# EAGLE board xmega-a3u-header (EAGLE 7.6.0)
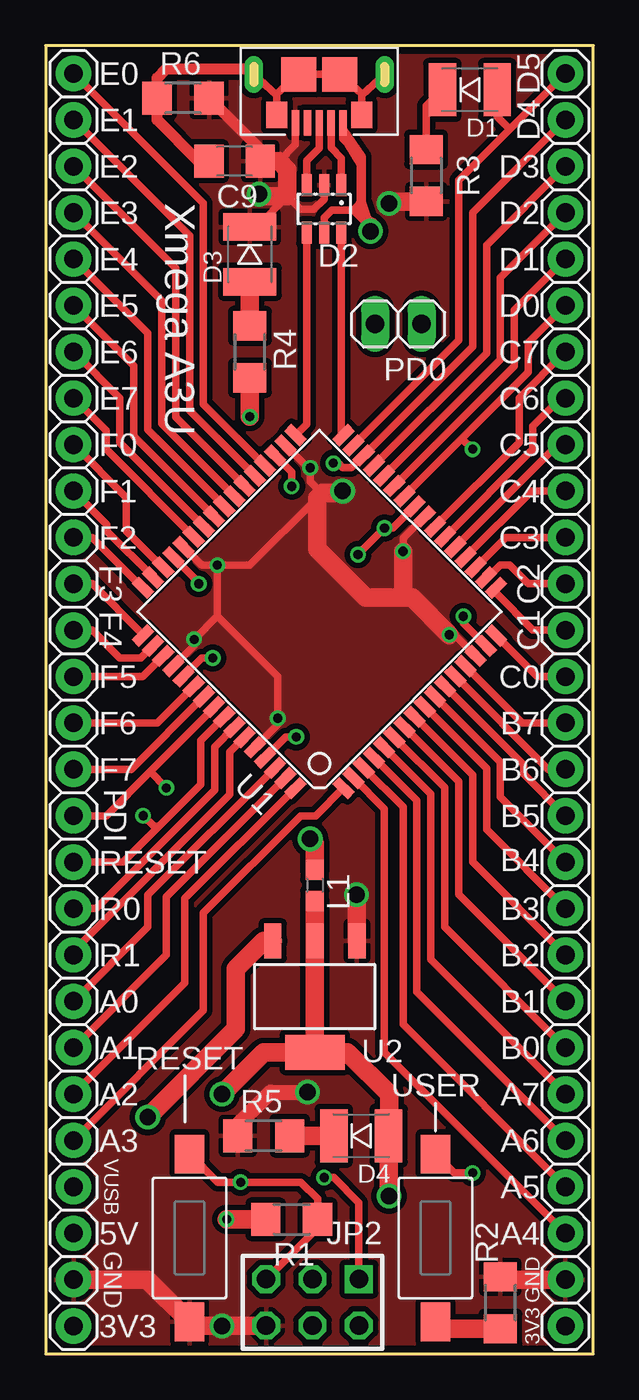
[diagram p0: board, top side]
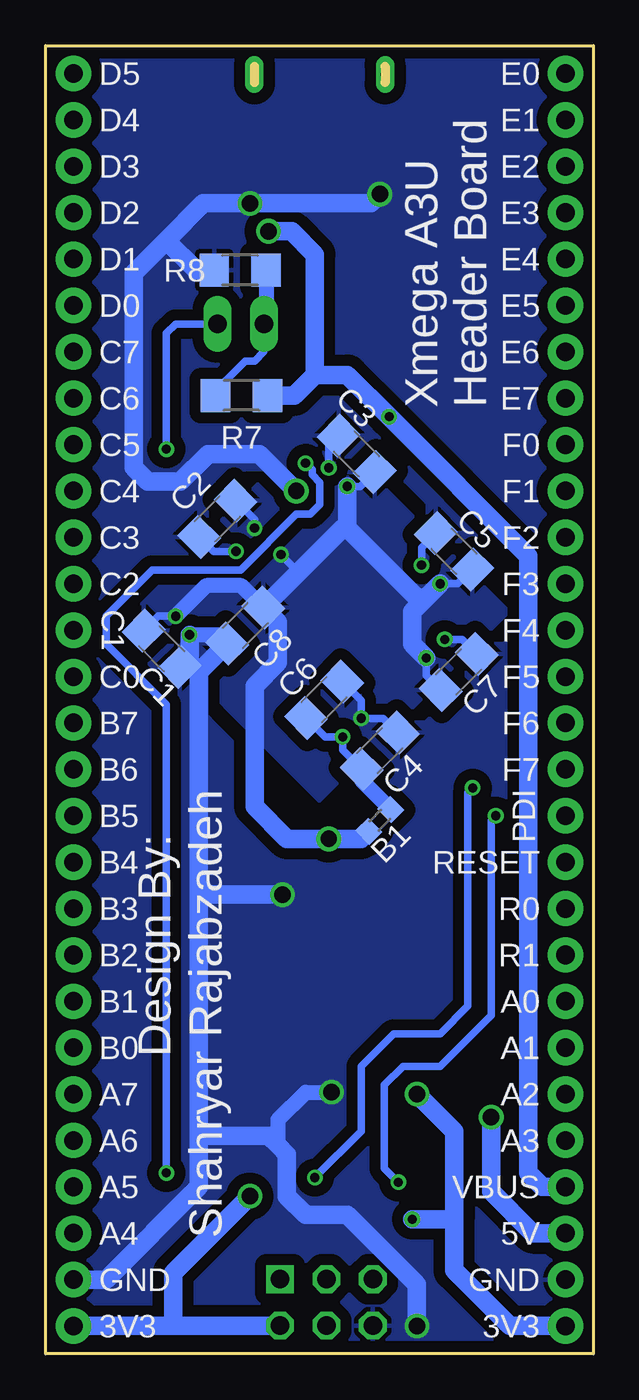
[diagram p1: board, bottom side, seen from below]

Size 29.97 x 71.63 mm. Coordinates in mm from the lower left corner, seen from the top.
Outline: 0,0 29.97,0 29.97,71.63 0,71.63 0,0
Copper layers (1*16): Top 0.0356mm / dielectric 1.5011mm / Bottom 0.0356mm
Design rules "oshpark-2layer": minimum track width 6mil, minimum drill 13mil, track to track 6mil, track to pad 6mil, pad to pad 6mil, via to via 6mil, smd to smd 6mil, copper to edge 15mil, drill to drill 6mil, minimum pad ring 7mil, minimum via ring 7mil, stop-mask expansion 2.5mil, vias tented up to drill 0mil, thermal gap 10mil

## Footprints (pad centres in the part's own frame; a part is rotated, then mirrored left to right if it is on the bottom)
B0603 = smd 1 x 1.1: 1 -0.85,0; 2 0.85,0
C1206 = smd 1.6 x 1.8: 1 -1.4,0; 2 1.4,0
1210K = smd 1.5 x 2.9: NEG 1.5,0; POS -1.5,0
SOT23-6 = smd 0.55 x 1.2: 1 -0.95,-1.3; 2 0,-1.3; 3 0.95,-1.3; 4 0.95,1.3; 5 0,1.3; 6 -0.95,1.3
1X28C = drill 1.016 pad 1.93: 1 -34.29,0; 2 -31.75,0; 3 -29.21,0; 4 -26.67,0; 5 -24.13,0; 6 -21.59,0; 7 -19.05,0; 8 -16.51,0; 9 -13.97,0; 10 -11.43,0; 11 -8.89,0; 12 -6.35,0; 13 -3.81,0; 14 -1.27,0; 15 1.27,0; 16 3.81,0; 17 6.35,0; 18 8.89,0; 19 11.43,0; 20 13.97,0; 21 16.51,0; 22 19.05,0; 23 21.59,0; 24 24.13,0; 25 26.67,0; 26 29.21,0; 27 31.75,0; 28 34.29,0
AVR-ISP-6 = drill 1.016 square: 1 -2.54,-1.27 | drill 1.016 octagon: 2 -2.54,1.27; 3 0,-1.27; 4 0,1.27; 5 2.54,-1.27; 6 2.54,1.27
USB3076-30-A = smd 1.9 x 1.9: BIG_PAD_LEFT 5.125,1.45; BIG_PAD_RIGHT 2.875,1.45 | smd 0.4 x 1.4: D+ 4,4.1; D- 3.35,4.1; GND 5.3,4.1; ID 4.65,4.1; VBUS 2.7,4.1 | drill 0.45 pad 1.016 long: MECH_RIGHT 0.42,1.45; SHIELD_LEFT 7.58,1.45 | smd 1.15 x 1.45: PAD_LEFT 6.32,3.68; PAD_RIGHT 1.68,3.68
L0603 = smd 1.1 x 1: 1 -0.85,0; 2 0.85,0
1X02 = drill 1.016 long: 1 -1.27,0; 2 1.27,0
R1206 = smd 1.6 x 1.803: 1 -1.422,0; 2 1.422,0
FSMSM = smd 2.11 x 1.6: 1 -4.595,0; 2 4.595,0
TQFP64 = smd 1.194 x 0.559: 1 -7.76,5.905; 2 -7.76,5.118; 3 -7.76,4.331; 4 -7.76,3.543; 5 -7.76,2.756; 6 -7.76,1.968; 7 -7.76,1.181; 8 -7.76,0.394; 9 -7.76,-0.394; 10 -7.76,-1.181; 11 -7.76,-1.968; 12 -7.76,-2.756; 13 -7.76,-3.543; 14 -7.76,-4.331; 15 -7.76,-5.118; 16 -7.76,-5.905; 33 7.76,-5.905; 34 7.76,-5.118; 35 7.76,-4.331; 36 7.76,-3.543; 37 7.76,-2.756; 38 7.76,-1.968; 39 7.76,-1.181; 40 7.76,-0.394; 41 7.76,0.394; 42 7.76,1.181; 43 7.76,1.968; 44 7.76,2.756; 45 7.76,3.543; 46 7.76,4.331; 47 7.76,5.118; 48 7.76,5.905 | smd 0.559 x 1.194: 17 -5.905,-7.76; 18 -5.118,-7.76; 19 -4.331,-7.76; 20 -3.543,-7.76; 21 -2.756,-7.76; 22 -1.968,-7.76; 23 -1.181,-7.76; 24 -0.394,-7.76; 25 0.394,-7.76; 26 1.181,-7.76; 27 1.968,-7.76; 28 2.756,-7.76; 29 3.543,-7.76; 30 4.331,-7.76; 31 5.118,-7.76; 32 5.905,-7.76; 49 5.905,7.76; 50 5.118,7.76; 51 4.331,7.76; 52 3.543,7.76; 53 2.756,7.76; 54 1.968,7.76; 55 1.181,7.76; 56 0.394,7.76; 57 -0.394,7.76; 58 -1.181,7.76; 59 -1.968,7.76; 60 -2.756,7.76; 61 -3.543,7.76; 62 -4.331,7.76; 63 -5.118,7.76; 64 -5.905,7.76
SOT223TAB = smd 0.95 x 1.9: 1 -2.3,-3.05; 2 0,-3.05; 3 2.3,-3.05 | smd 3.25 x 1.9: 4 0,3.05

## Placement (x,y rotation side)
B1  FERRITE_BEADB0603  [B0603]  11.68,29.21 225 bottom
C1  100nF  [C1206]  23.62,38.61 315 bottom
C2  100nF  [C1206]  20.57,45.72 225 bottom
C3  100nF  [C1206]  12.95,49.28 135 bottom
C4  100n  [C1206]  11.68,33.02 45 bottom
C5  100nF  [C1206]  7.62,43.94 135 bottom
C6  10u  [C1206]  14.73,35.81 45 bottom
C7  100nF  [C1206]  7.37,37.34 45 bottom
C8  10u  [C1206]  19.05,39.88 225 bottom
C9  4.7n  [C1206]  10.34,65.3 180 top
D1  LED  [1210K]  23.22,69.22 180 top
D2  ESD_USB  [SOT23-6]  15.24,62.69 180 top
D3  LED  [1210K]  11.18,60.2 90 top
D4  LED  [1210K]  17.27,11.94 180 top
JP1  PINHD-1X28SC  [1X28C]  28.45,35.81 90 top
JP2  AVR-PDIVERT  [AVR-ISP-6]  14.61,2.82 180 top
JP3  PINHD-1X28SC  [1X28C]  1.52,35.81 90 top
JP4  USB_MICRO_B  [USB3076-30-A]  18.97,71.5 180 top
L1  10u  [L0603]  14.73,25.65 270 top
PD0  [1X02]  19.3,56.39 180 top
R1  10k  [R1206]  13.46,7.37 180 top
R2  1k  [R1206]  24.89,2.79 270 top
R3  1k  [R1206]  20.83,64.52 90 top
R4  10k  [R1206]  11.18,54.86 270 top
R5  1k  [R1206]  11.94,11.94 0 top
R6  1M  [R1206]  7.52,68.76 0 top
R7  1k  [R1206]  19.25,52.48 0 bottom
R8  1.5k  [R1206]  19.33,59.33 0 bottom
RESET  TACTILE-BUTTONSMD-2PIN  [FSMSM]  7.87,6.35 90 top
U1  XMEGA-A3(U)TQFP  [TQFP64]  14.99,40.64 135 top
U2  [SOT223TAB]  14.73,19.56 180 top
USER  TACTILE-BUTTONSMD-2PIN  [FSMSM]  21.34,6.35 270 top

## Library data of the parts
B1 D1-D4 JP4 RESET U2 USER = USB-req
C1-C9 L1 = rcl
JP1 JP3 PD0 = pinhead
JP2 U1 = avr-7
R1-R8 = resistor

## Nets
1: C9.2 JP4.BIG_PAD_LEFT JP4.BIG_PAD_RIGHT JP4.MECH_RIGHT JP4.PAD_LEFT JP4.PAD_RIGHT JP4.SHIELD_LEFT R6.1
+3V3: D4.POS JP1.1 JP2.2 JP3.1 L1.2 R1.2 U2.2 U2.4
+5V: JP3.3 U2.3
D+: D2.3 JP4.D+
D-: D2.1 JP4.D-
DIGITAL_VCC: B1.2 C1.1 C2.1 C3.1 C5.1 C7.1 C8.1 L1.1 U1.15 U1.25 U1.35 U1.45 U1.53
GND: C1.2 C2.2 C3.2 C4.2 C5.2 C6.2 C7.2 C8.2 C9.1 D2.2 D3.NEG JP1.2 JP2.6 JP3.2 JP4.GND R2.1 R3.1 R5.1 R6.2 R8.1 RESET.1 U1.14 U1.24 U1.34 U1.44 U1.52 U1.60 U2.1
N$1: D3.POS R4.1
N$2: B1.1 C4.1 C6.1 U1.61
N$3: R2.2 USER.2
N$4: D4.NEG R5.2
N$5: D1.NEG R3.2
N$6: PD0.2 R7.1 R8.2
PA0: JP3.8 U1.62
PA1: JP3.7 U1.63
PA2: JP3.6 U1.64
PA3: JP3.5 U1.1
PA4: JP1.3 U1.2
PA5: JP1.4 U1.3
PA6: JP1.5 U1.4
PA7: JP1.6 U1.5
PB0: JP1.7 U1.6
PB1: JP1.8 U1.7
PB2: JP1.9 U1.8
PB3: JP1.10 U1.9
PB4: JP1.11 U1.10
PB5: JP1.12 U1.11
PB6: JP1.13 U1.12
PB7: JP1.14 U1.13
PC0: JP1.15 U1.16
PC1: JP1.16 U1.17
PC2: JP1.17 U1.18
PC3: JP1.18 U1.19
PC4: JP1.19 U1.20
PC5: JP1.20 U1.21
PC6: JP1.21 U1.22
PC7: JP1.22 U1.23
PD0: JP1.23 PD0.1 U1.26
PD1: JP1.24 U1.27
PD2: JP1.25 U1.28
PD3: JP1.26 U1.29
PD4: JP1.27 U1.30 USER.1
PD5: D1.POS JP1.28 U1.31
PD6: D2.6 U1.32
PD7: D2.4 U1.33
PDI-CLK: JP2.5 JP3.11 R1.1 RESET.2 U1.57
PDI-DATA: JP2.1 JP3.12 U1.56
PE0: JP3.28 U1.36
PE1: JP3.27 U1.37
PE2: JP3.26 U1.38
PE3: JP3.25 U1.39
PE4: JP3.24 U1.40
PE5: JP3.23 U1.41
PE6: JP3.22 U1.42
PE7: JP3.21 U1.43
PF0: JP3.20 U1.46
PF1: JP3.19 U1.47
PF2: JP3.18 U1.48
PF3: JP3.17 U1.49
PF4: JP3.16 U1.50
PF5: JP3.15 U1.51
PF6: JP3.14 U1.54
PF7: JP3.13 U1.55
PR0: JP3.10 U1.58
PR1: JP3.9 U1.59
VBUS: D2.5 JP3.4 JP4.VBUS R4.2 R7.2

## Tracks (layer width: path | path; a pad name or v marks a point on that pad's centre or on a via)
1
  Top 0.406: JP4.MECH_RIGHT 17.29,68.92 JP4.PAD_RIGHT 17.29,68.98 JP4.BIG_PAD_RIGHT JP4.BIG_PAD_LEFT 12.65,68.98 12.65,68.92 | JP4.PAD_LEFT 12.65,68.92 | 12.65,68.92 JP4.SHIELD_LEFT
  Top 0.61: C9.2 8.36,65.3 6.1,67.56 R6.1 6.1,69.85 6.6,70.36 11.09,70.36 JP4.SHIELD_LEFT
+3V3  (via drill 0.5, 0.9)
  Top 1.016: L1.2 U2.2 U2.4 | U2.4 11.94,16.51 v9.65,14.22 | U2.4 16.51,16.51 18.8,14.22 18.8,11.96 D4.POS 18.77,8.66 v18.8,8.64 | R1.2 v9.91,7.37
  Bottom 1.016: v9.65,14.22 7.62,12.19 7.62,7.37 | JP3.1 4.57,1.52 7.62,4.57 7.62,7.37 | JP1.1 28.42,1.55 22.98,1.55 | 22.98,1.55 22.98,4.45 v18.8,8.64 | JP2.2 22.98,1.55 | 7.62,7.37 v9.91,7.37
+5V  (via drill 0.9)
  Top 1.016: U2.3 11.94,22.61 10.41,21.08 10.41,17.78 v5.59,12.95
  Bottom 1.016: v5.59,12.95 5.59,8.89 3.3,6.6 JP3.3
D+
  Top 0.406: D2.3 14.29,65.32 14.99,66.02 14.99,67.39 JP4.D+
D-
  Top 0.406: D2.1 16.19,65.47 15.62,66.04 JP4.D-
DIGITAL_VCC  (via drill 0.5, 0.9)
  Top 0.406: U1.25 19,45.21 v18.54,45.21 v17.09,43.76 | U1.35 13.46,48.29 v13.46,47.5 | U1.45 8.38,42.23 v8.38,42.16 | U1.53 8.55,38.1 v9.14,38.1 | U1.15 22.86,40 v22.86,40.39
  Top 1.016: L1.1 14.73,27.94 v14.48,28.19
  Bottom 0.406: C2.1 18.54,45.67 v18.54,45.21 | C3.1 12.75,47.5 v13.46,47.5 | C5.1 7.42,42.16 v8.38,42.16 | C7.1 9.14,37.14 v9.14,38.1 | C1.1 23.82,40.39 v22.86,40.39 | B1.2 12.7,28.19 | v17.09,43.76 16.38,43.05 15.88,43.05
  Bottom 0.813: C8.1 19.25,42.06 21.18,42.06 v22.86,40.39
  Bottom 1.016: 12.7,28.19 v14.48,28.19 16.76,28.19 18.54,29.97 18.54,36.58 17.27,37.85 17.27,40.08 C8.1 15.88,43.05 13.72,45.21 13.46,45.21 | v8.38,42.16 9.14,41.4 | v13.46,47.5 13.46,45.21 | 13.46,45.21 9.65,41.4 9.14,41.4 | 9.14,41.4 9.91,40.64 9.91,38.86 v9.14,38.1
  pour Bottom (isolate 0.61): 14.99,51.05 4.57,40.64 14.99,30.23 25.4,40.64
GND  (via drill 0.5, 0.9)
  Top 0.406: D2.2 15.24,63.22 14.68,62.66 13.95,62.66 13.23,63.37 11.56,61.7 D3.NEG | U1.24 19.56,44.66 v19.56,43.94 | U1.34 14.35,48.51 v14.48,48.51 14.48,47.75 15.11,47.12 14.86,46.86 11.18,43.18 v9.4,43.18 | U1.44 8.55,43.18 v9.4,43.18 | U1.60 12.7,34.46 v12.7,34.8 12.7,37.08 9.4,40.39 | U1.52 8.13,38.79 v8.13,39.12 9.4,40.39 | U1.14 22.38,39.37 v22.1,39.37 | 9.4,40.39 v9.4,43.18 | JP4.GND 13.67,66.2 12.78,65.3
  Top 0.61: C9.1 11.74,65.96 R6.2
  Top 0.813: R5.1 10.52,12.55 12.29,14.33 v14.33,14.33
  Top 1.016: R3.1 18.9,63.09 v18.8,62.99 | 15.11,47.12 16.13,47.12 v16.26,47.24 | v11.68,63.5 11.81,63.37 13.23,63.37 13.23,64.85 12.78,65.3 C9.1 | v22.1,39.37 20.07,41.4 19.56,41.4 | 19.56,41.4 17.53,41.4 14.86,44.07 14.86,46.86 | v19.56,43.94 19.56,41.4 | U2.1 17.02,22.62 v17.02,25.15 | JP3.2 5.57,4.06 RESET.1 | RESET.1 8.08,1.55 JP2.6 | v9.65,1.52 8.11,1.52 RESET.1 | R2.1 25.04,4.06 JP1.2
  Bottom 0.406: C2.2 20.78,43.94 v19.56,43.94 | C3.2 14.48,49.73 v14.48,48.51 | C5.2 9.4,44.14 v9.4,43.18 | C6.2 12.7,35.76 v12.7,34.8 11.48,34.8 C4.2 | C7.2 7.16,39.12 v8.13,39.12 | C1.2 22.1,38.15 | v22.1,39.37 21.97,39.24
  Bottom 0.813: C8.2 20.52,39.37 v22.1,39.37 | 17.25,11.4 17.25,12.83 15.75,14.33 v14.33,14.33
  Bottom 1.016: 22.1,38.15 v22.1,39.37 | 23.37,60.96 21.34,62.99 v18.8,62.99 12.19,62.99 v11.68,63.5 | 23.37,60.96 25.15,59.18 25.15,48.51 24.38,47.75 22.61,47.75 21.08,49.28 18.29,49.28 v16.26,47.24 | R8.1 21.74,59.33 23.37,60.96 | C8.2 21.59,37.34 21.59,25.15 | JP1.2 26.67,4.06 21.59,9.14 21.59,11.94 | v17.02,25.15 21.59,25.15 | v9.65,1.52 9.65,3.81 13.46,7.62 15.75,7.62 16.76,8.64 16.76,10.92 17.25,11.4 17.78,11.94 21.59,11.94 | 21.59,25.15 21.59,11.94
  pour Top (isolate 0.305): 0,71.63 29.97,71.63 29.97,0 0,0
  pour Bottom (isolate 0.61, rank 2): 0,71.63 29.97,71.63 29.97,0 0,0
N$1
  Top 1.016: D3.POS R4.1
N$2  (via drill 0.5)
  Top 0.406: U1.61 13.14,33.78 v13.72,33.78
  Bottom 0.406: C4.1 13.72,33.07 v13.72,33.78 14.68,33.78 C6.1
  Bottom 0.813: B1.1 12.67,31.4 C4.1
N$3
  Top 1.016: R2.2 21.72,1.37 USER.2
N$4
  Top 1.016: D4.NEG R5.2
N$5
  Top 0.406: D1.NEG 20.83,68.33 R3.2
N$6
  Bottom 0.406: R7.1 20.68,52.73 19.05,54.36 18.54,54.36 18.03,54.86 PD0.2 17.91,56.52
  Bottom 0.813: R8.2 17.91,56.52
PA0
  Top 0.406: U1.62 5.59,25.12 5.59,23.37 JP3.8
PA1
  Top 0.406: U1.63 6.6,25.02 6.6,21.84 JP3.7
PA2
  Top 0.406: U1.64 7.62,24.92 7.62,20.32 JP3.6
PA3
  Top 0.406: U1.1 14.78,29.46 13.97,29.46 8.64,24.13 8.64,18.8 JP3.5
PA4
  Top 0.406: U1.2 18.54,29.85 18.54,16.51 JP1.3
PA5
  Top 0.406: U1.3 19.56,29.94 19.56,18.03 JP1.4
PA6
  Top 0.406: U1.4 20.32,30.3 20.32,19.81 JP1.5
PA7
  Top 0.406: U1.5 21.08,30.65 21.08,21.59 JP1.6
PB0
  Top 0.406: U1.6 21.84,31 21.84,23.37 JP1.7
PB1
  Top 0.406: U1.7 22.61,31.35 22.61,25.15 JP1.8
PB2
  Top 0.406: U1.8 23.37,31.7 23.37,26.92 JP1.9
PB3
  Top 0.406: U1.9 24.13,32.05 24.13,28.7 JP1.10
PB4
  Top 0.406: U1.10 24.89,32.4 24.89,30.48 JP1.11
PB5
  Top 0.406: U1.11 26.16,32.25 26.16,31.75 JP1.12
PB6
  Top 0.406: U1.12 27.52,32 JP1.13
PB7
  Top 0.406: U1.13 26.09,34.54 JP1.14
PC0
  Top 0.406: U1.16 26.89,37.08 JP1.15
PC1
  Top 0.406: U1.17 24.65,41.65 26.67,39.62 JP1.16
PC2
  Top 0.406: U1.18 24.09,42.46 24.13,42.42 24.89,43.18 25.4,43.18 26.42,42.16 JP1.17
PC3
  Top 0.406: U1.19 25.18,44.7 JP1.18
PC4
  Top 0.406: U1.20 26.6,47.24 JP1.19
PC5
  Top 0.406: U1.21 28.03,49.78 JP1.20
PC6
  Top 0.406: U1.22 26.67,49.54 26.67,50.8 28.19,52.32 JP1.21
PC7
  Top 0.406: U1.23 25.91,49.89 25.91,52.32 JP1.22
PD0  (via drill 0.5)
  Top 0.406: U1.26 22.79,50.11 | 22.79,50.11 26.42,53.74 26.42,55.37 JP1.23 | v23.37,49.53 | v23.37,49.53 22.79,50.11
  Bottom 0.406: PD0.1 22.86,56.39 23.37,55.88 v23.37,49.53
PD1
  Top 0.406: U1.27 25.65,54.09 25.65,57.15 JP1.24
PD2
  Top 0.406: U1.28 24.89,54.44 24.89,58.93 JP1.25
PD3
  Top 0.406: U1.29 24.13,54.8 24.13,60.71 JP1.26
PD4  (via drill 0.5)
  Top 0.406: JP1.27 23.37,62.48 23.37,55.15 U1.30 16.73,48.51 16.26,48.51 16,48.77 v15.75,48.77 | USER.1 22.38,9.91 v23.37,9.91
  Bottom 0.406: v15.75,48.77 15.39,48.41 15.39,48.13 14.96,47.7 14.96,46.51 15.49,45.97 16.26,45.97 19.3,42.93 24.13,42.93 26.67,40.39 26.67,38.86 23.37,35.56 v23.37,9.91
PD5
  Top 0.406: U1.31 22.61,55.5 22.61,64.26 25.4,67.06 | 25.4,67.06 JP1.28 | D1.POS 24.72,67.74 25.4,67.06
PD6
  Top 0.406: U1.32 16.19,50.41 D2.6
PD7
  Top 0.406: U1.33 14.29,50.92 D2.4
PDI-CLK  (via drill 0.5)
  Top 0.406: U1.57 8.48,33.58 8.48,31.17 6.18,28.87 | 6.18,28.87 4.24,26.92 JP3.11 | v5.33,29.46 5.93,28.87 6.18,28.87 | RESET.2 9.42,9.4 v10.67,9.4 13.97,9.4 14.88,8.48 R1.1 14.88,6.91 JP2.5
  Bottom 0.406: v10.67,9.4 11.43,10.16 11.43,14.73 10.41,15.75 8.38,15.75 5.59,18.54 5.59,29.21 v5.33,29.46
PDI-DATA  (via drill 0.5)
  Top 0.406: U1.56 9.22,35.38 5.71,31.88 | 5.71,31.88 3.3,29.46 JP3.12 | v6.6,30.99 5.71,31.88 | v15.24,9.65 15.77,9.65 17.14,8.28 JP2.1
  Bottom 0.406: v15.24,9.65 12.7,12.19 12.7,15.75 10.92,17.53 8.38,17.53 6.86,19.05 6.86,30.73 v6.6,30.99
PE0
  Top 0.406: U1.36 8.64,52 8.64,62.99 JP3.28
PE1
  Top 0.406: U1.37 7.87,51.65 7.87,61.21 JP3.27
PE2
  Top 0.406: U1.38 7.11,51.3 7.11,59.44 JP3.26
PE3
  Top 0.406: U1.39 6.35,50.95 6.35,57.66 JP3.25
PE4
  Top 0.406: U1.40 5.59,50.59 5.59,55.88 JP3.24
PE5
  Top 0.406: U1.41 4.83,50.24 4.83,54.1 JP3.23
PE6
  Top 0.406: U1.42 4.06,49.89 4.06,52.32 JP3.22
PE7
  Top 0.406: U1.43 3.3,49.54 3.3,50.55 JP3.21
PF0
  Top 0.406: U1.46 6.42,43.06 4.42,45.06 4.42,46.89 JP3.20
PF1
  Top 0.406: U1.47 5.88,42.53 3.35,45.06 3.35,45.41 JP3.19
PF2
  Top 0.406: U1.48 5.29,41.95 2.54,44.7 JP3.18
PF3
  Top 0.406: U1.49 5.32,39.38 2.54,42.16 JP3.17
PF4
  Top 0.406: U1.50 5.21,38.1 4.06,38.1 2.54,39.62 JP3.16
PF5
  Top 0.406: U1.51 5.3,37.08 JP3.15
PF6
  Top 0.406: U1.54 6.11,34.54 JP3.14
PF7
  Top 0.406: U1.55 4.68,32 JP3.13
PR0
  Top 0.406: U1.58 9.25,33.22 9.25,30.86 2.77,24.38 JP3.10
PR1
  Top 0.406: U1.59 10.08,32.95 10.08,30.63 1.52,22.07 JP3.9
VBUS  (via drill 0.5, 0.9)
  Top 0.406: D2.5 15.24,62.2 15.65,62.61 16.89,62.61 | JP4.VBUS 16.27,66.53 16.51,66.29 | 16.51,66.29 17.27,65.53 17.3,65.56 17.32,65.56 16.28,67.06 | 16.51,66.29 17.27,65.02
  Top 0.508: 17.78,61.72 16.89,62.61 17.27,62.99 17.27,65.02 17.27,65.53
  Top 0.61: v17.78,61.47 17.27,62.99
  Top 1.016: v17.78,61.47 17.78,61.72 | R4.2 v11.18,51.31
  Bottom 1.016: R7.2 16.36,52.48 15.24,53.59 | 15.24,53.59 15.24,60.2 16.51,61.47 v17.78,61.47 | 15.24,53.59 13.46,53.59 v11.18,51.31 3.56,43.69 3.56,9.91 2.79,9.14 JP3.4

## Text on the board
bPlace: Xmega A3U / Header Board | Design By: | Shahryar Rajabzadeh
tNames: E0 | D5 | E1 | D4 | E2 | D3 | E3 | D2 | E4 | D1 | E5 | Xmega A3U | D0 | E6 | C7 | E7 | C6 | F0 | C5 | F1 | C4 | F2 | C3 | F3 | C2 | F4 | C1 | F5 | C0 | F6 | B7 | F7 | B6 | PDI | B5 | RESET | B4 | R0 | B3 | R1 | B2 | A0 | B1 | A1 | B0 | A2 | A7 | A3 | A6 | VUSB | A5 | 5V | A4 | GND | GND | 3V3 | 3V3
bNames: E0 | D5 | E1 | D4 | E2 | D3 | E3 | D2 | E4 | D1 | E5 | D0 | E6 | C7 | E7 | C6 | F0 | C5 | F1 | C4 | F2 | C3 | F3 | C2 | F4 | C1 | F5 | C0 | F6 | B7 | F7 | B6 | PDI | B5 | RESET | B4 | R0 | B3 | R1 | B2 | A0 | B1 | A1 | B0 | A2 | A7 | A3 | A6 | VBUS | A5 | 5V | A4 | GND | GND | 3V3 | 3V3